# Altium PCB laser turret.PcbDoc
Units mm, origin at the board's own origin, x right, y up, seen from the top; angles counter-clockwise.
Board outline 44.45 x 35.81 mm, 2 copper layers (Top Layer, Bottom Layer); 30 components, 20 nets, 104 pads, 20 vias.
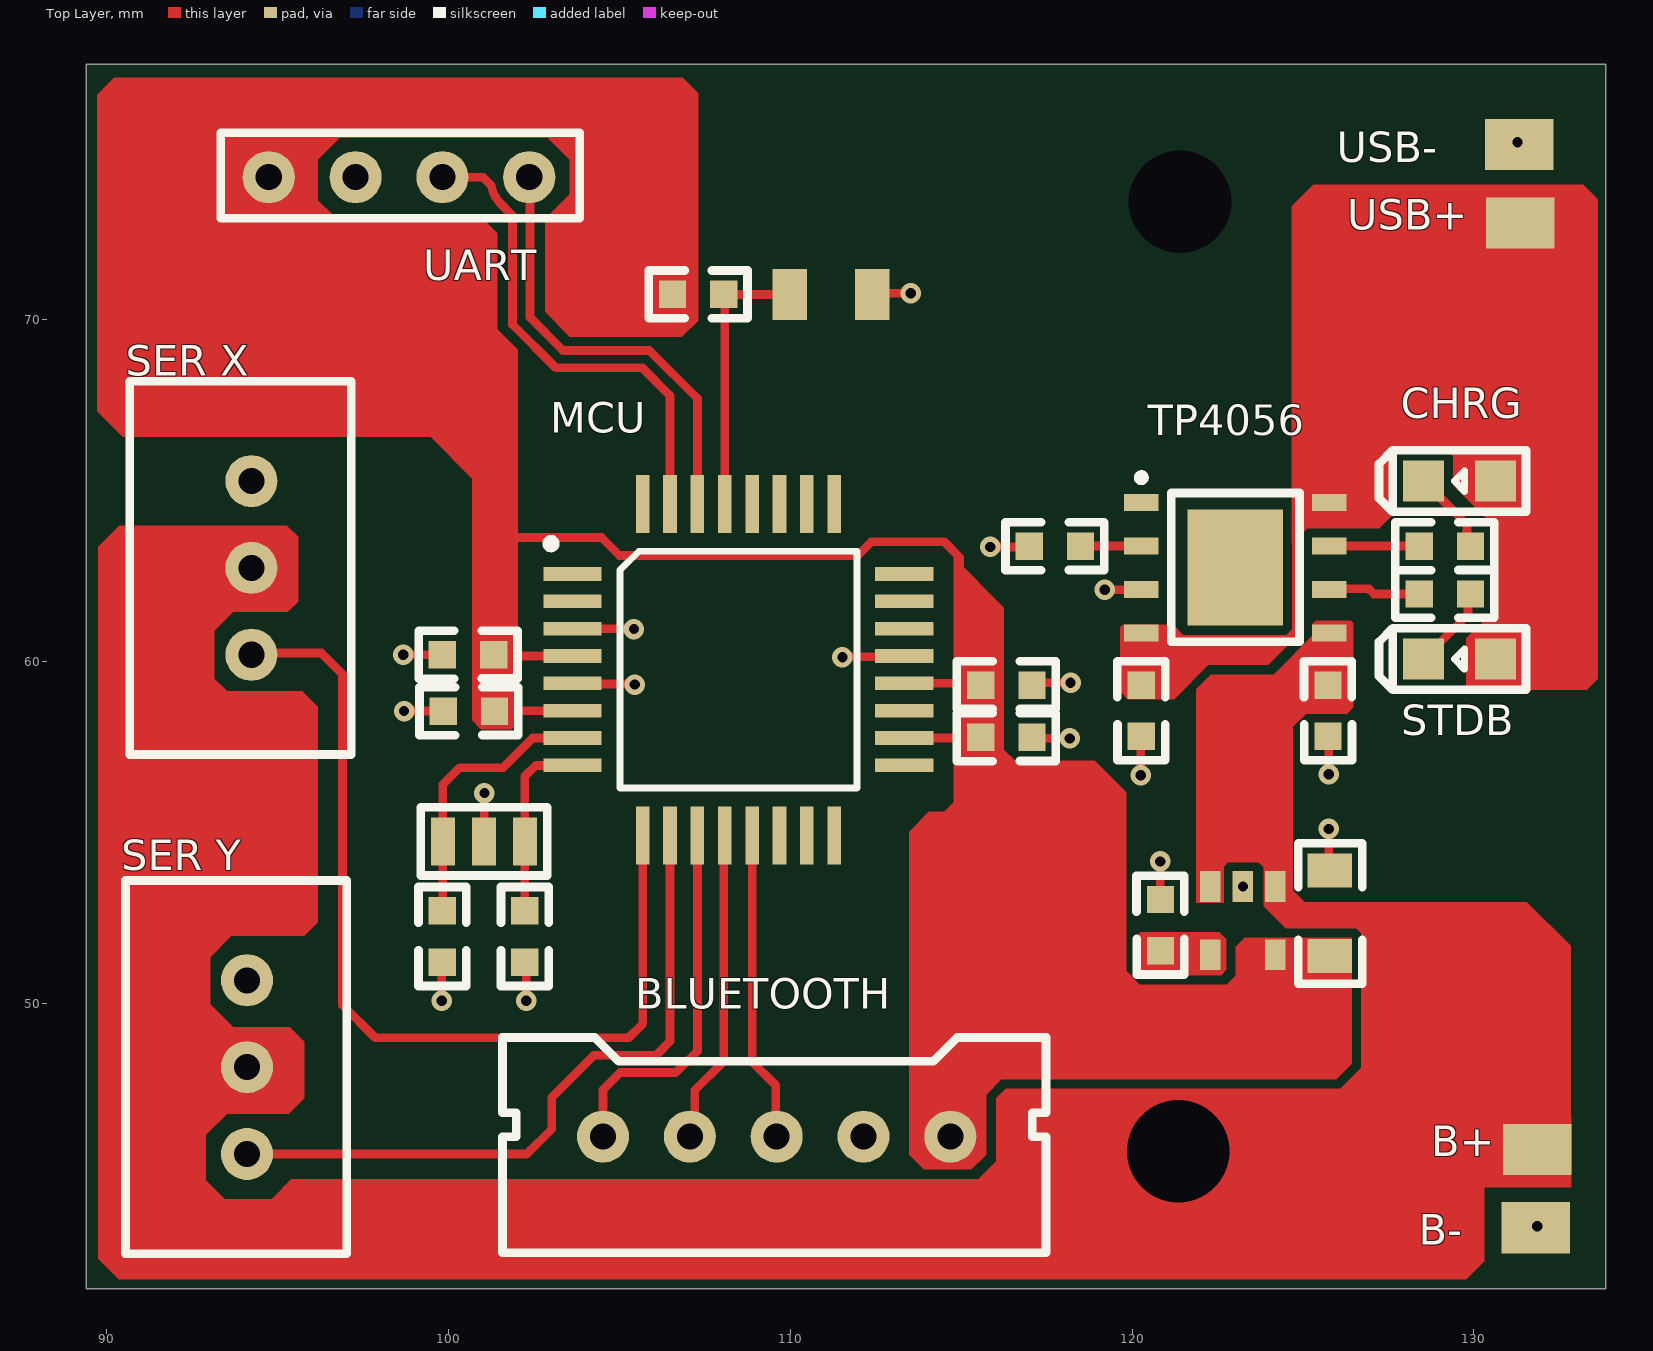
[diagram p0: Top Layer view]
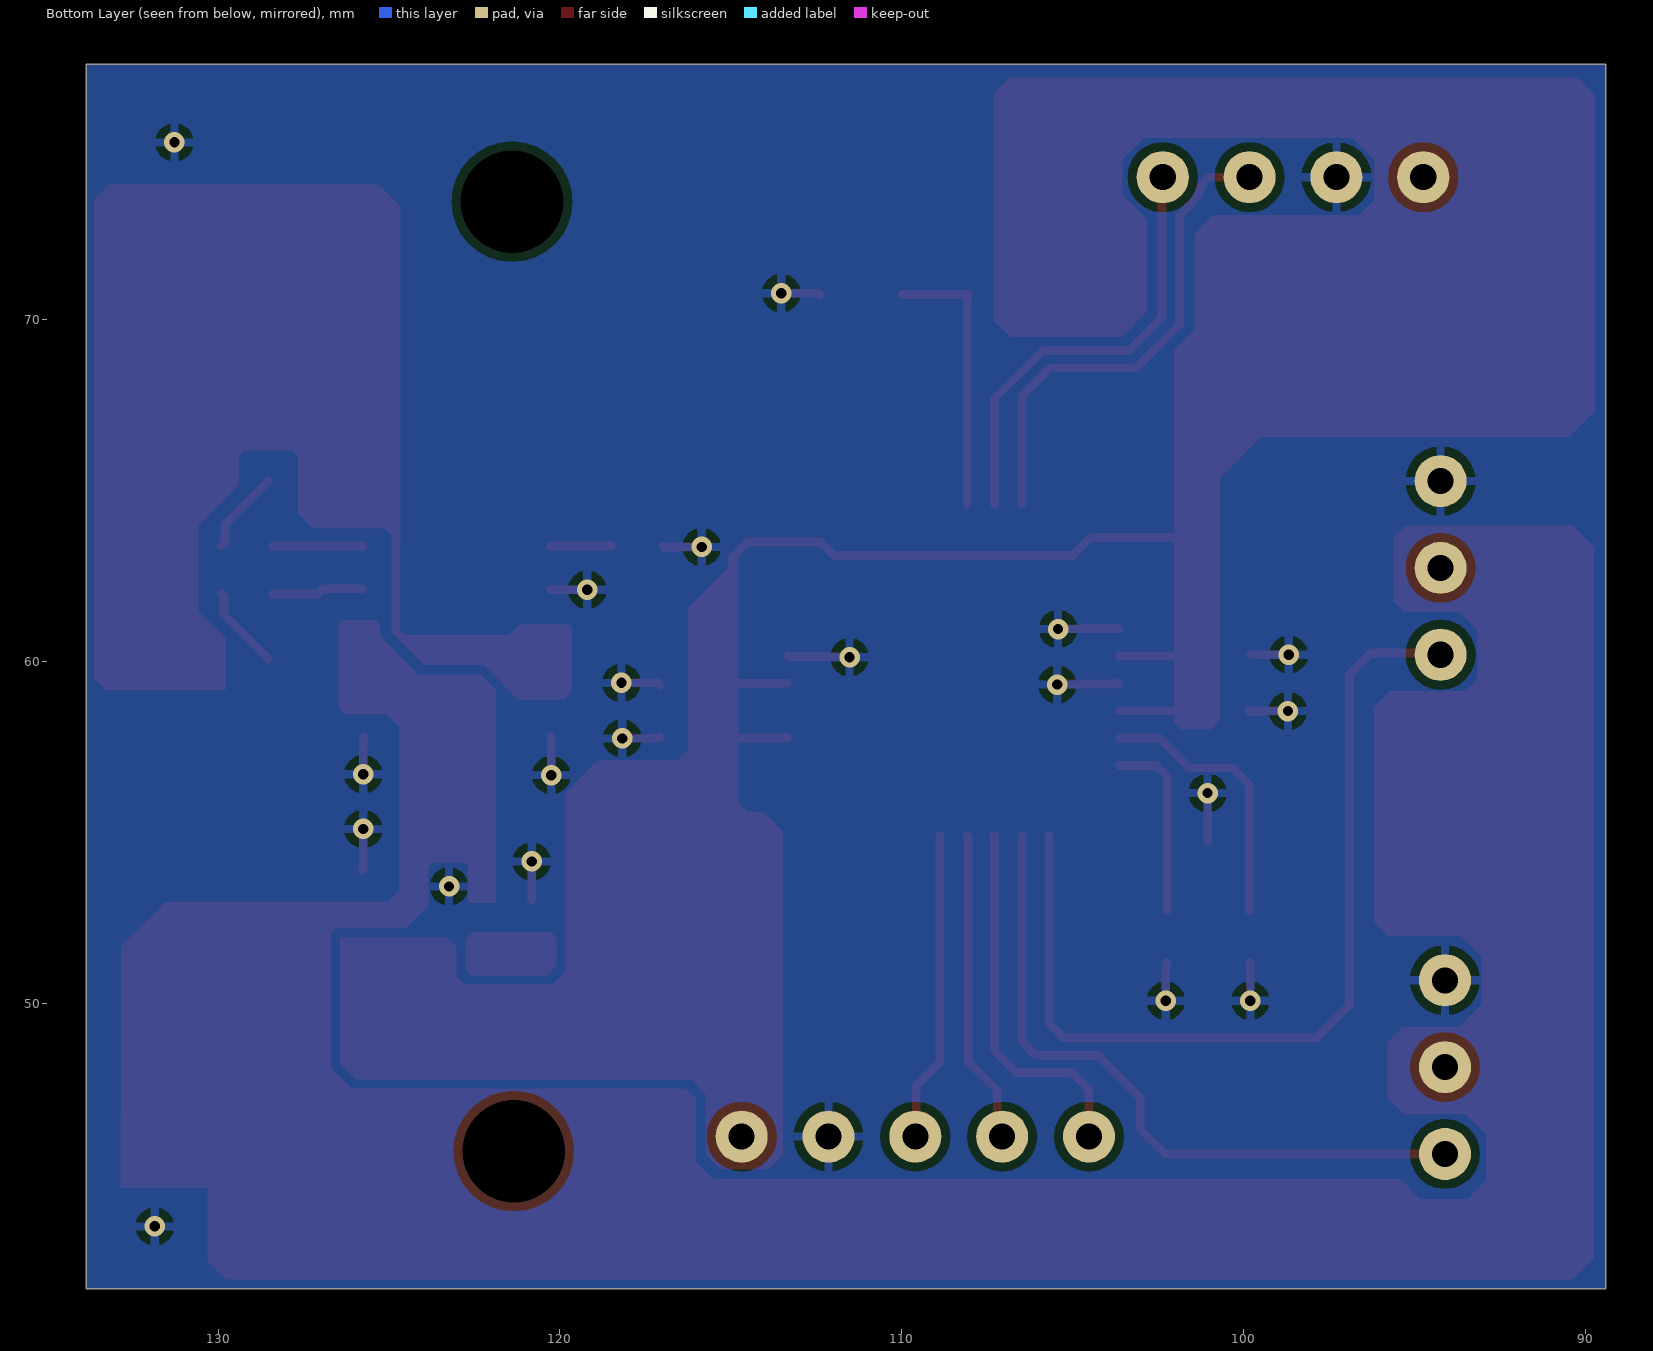
[diagram p1: Bottom Layer view, seen from below]
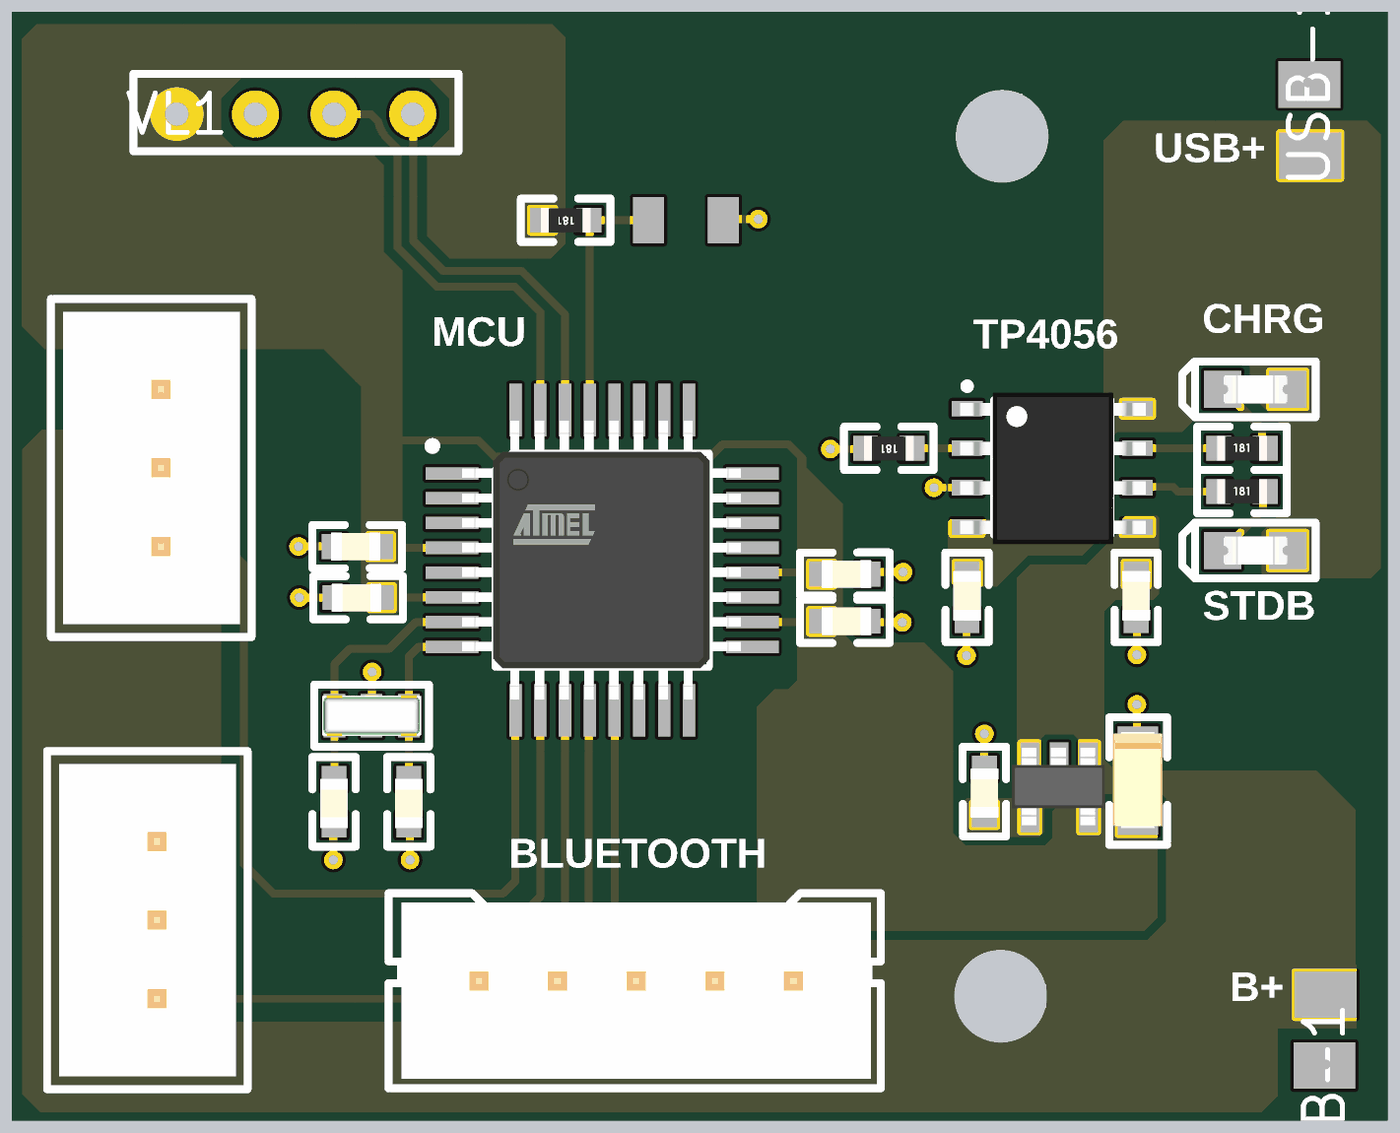
[diagram p2: 3D render of the assembled board from above, using the file's embedded part models]

## Layer stack, top to bottom
Top Solder: solder mask 0.0102, Solder Resist, Dk 3.5
Top Layer: signal copper 0.0356
Dielectric 1: dielectric 0.32, FR-4, Dk 4.8
Bottom Layer: signal copper 0.0356
Bottom Solder: solder mask 0.0102, Solder Resist, Dk 3.5

## Board outline
89.408,41.656 89.408,77.47 133.858,77.47 133.858,41.656

## Design rules (kind name [scope] priority, off if disabled: settings)
Clearance [All] p1: gap=0.254 ignorepadtopadclearanceinfootprint=FALSE except(0: Arc-Hole Track-Hole SMDPad-Hole THPad-Hole Via-Hole Fill-Hole Poly-Hole Region-Hole Text-Hole)
PolygonConnect [All] p1: connectstyle=Relief reliefconductorwidth=0.254 reliefentries=4 polygonreliefangle="90 Angle" airgapwidth=0.254
RoutingVias [All] p1: holewidth=0.711 width=1.27 viastyle="Through Hole" minholewidth=0.711 minwidth=1.27 maxholewidth=0.711 maxwidth=1.27
SolderMaskExpansion [All] p1: expansion=0.102 istentingtop=FALSE
Width [All] p1: maxlimit=0.254 minlimit=0.254 preferedwidth=0.254
30 further rules are at their usual default settings.

## Classes and differential pairs
component class "laser turret": "  " BLUETOOTH CHRG MCU "SER X" STDB TP4056 UART USB+ USB-

## Components (designator, comment, footprint, x,y, rotation, side; value= is the part's Value field where it differs from the comment)
1 "3.3v reg" "3.3v reg" 124.192,53.419 r180 top
* "PAD" PAD#1 112.395,70.739 r90 top
* "PAD" PAD#1 109.982,70.739 r90 top
B+ "PAD" PAD#2 131.85,45.725 r270 top (schematic designator B+1)
B- "PAD" PAD#2 131.807,43.433 r90 top (schematic designator B-1)
BLUETOOTH "5_PIN_JST" 5_PIN_JST 114.681,46.101 r180 top (schematic designator 2)
C1 "0603 CAP" "0603 CAP" 120.269,57.809 r90 top
C2 "0603 CAP" "0603 CAP" 125.73,57.809 r90 top
C3 "2.2uF TAN CAP" "2.2uF TAN CAP" 125.782,53.887 r270 top
C4 "0603 CAP" "0603 CAP" 101.322,60.198 r180 top
C5 "0603 CAP" "0603 CAP" 101.346,58.547 r180 top
C6 "0603 CAP" "0603 CAP" 115.57,57.785 r0 top
C7 "0603 CAP" "0603 CAP" 115.57,59.309 r0 top
C8 "0603 CAP" "0603 CAP" 120.829,53.038 r270 top
C9 "0603 CAP" "0603 CAP" 99.822,52.705 r270 top
C10 "0603 CAP" "0603 CAP" 102.235,52.705 r270 top
CHRG "SMD_0805_LED" 0805_LED 130.624,65.278 r180 top (schematic designator LED1)
MCU "atmega328p" atmega328p 103.632,62.56 r0 top (schematic designator U1)
R1 "0603 RES" "0603 RES" 129.897,63.373 r180 top
R2 "0603 RES" "0603 RES" 129.897,61.976 r180 top
R3 "0603 RES" "0603 RES" 116.991,63.373 r0 top
R4 "0603 RES" "0603 RES" 106.553,70.739 r0 top
"SER X" "servo" hall_jst 94.234,65.278 r270 top (schematic designator SER1)
"SER Y" "servo" hall_jst 94.107,50.673 r270 top (schematic designator SER2)
STDB "SMD_0805_LED" 0805_LED 130.624,60.071 r180 top (schematic designator LED2)
TP4056 "tp4056" tp4056 123.094,62.778 r0 top (schematic designator SOP1)
UART "VL53L0X" VL53L0x 94.742,74.168 r0 top (schematic designator VL1)
USB+ "PAD" PAD#2 131.35,72.825 r270 top (schematic designator USB+1)
USB- "PAD" PAD#2 131.325,75.125 r270 top (schematic designator USB-1)
X1 "smd crystal" "smd crystal" 102.235,54.737 r180 top

## Footprints (in the part's own frame and the unit in brackets; to place one, negate y for a bottom-side part, rotate by r counter-clockwise, add the part's x,y. Pads: shape width x height; smd on the part's side, far side on the other; paste and mask are expansions set on the pad)
"2.2uF TAN CAP" [mm]
  rect 1x1.3 smd: 1(0,0) 2(2.5,0)
  silkscreen extent -0.79,-0.93 3.32,0.95, body extent -0.33,-0.8 2.77,0.8, height 1.31
"3.3v reg" [mm]
  rect 0.6x0.9 smd: 1(0,0) 2(0.95,0) 3(1.9,0) 4(1.9,2) 5(0,2)
  body extent -0.52,-0.27 2.48,2.23, height 1.1
5_PIN_JST [mil]
  round 60 hole 30: 1(0,0) 2(100,0) 3(200,0) 4(300,0) 5(400,0)
  silkscreen extent -110,-114 516,134, body extent -98,-102 499,122, height 276
"0603 CAP" [mm]
  rect 0.8x0.8 smd: 1(0,0) 2(1.5,0)
  silkscreen extent -0.7,-0.7 2.2,0.7, body extent 0,-0.45 1.6,0.45, height 0.8
"0603 RES" [mm]
  rect 0.8x0.8 smd: 1(0,0) 2(1.5,0)
  silkscreen extent -0.7,-0.7 2.2,0.7, body extent -0.05,-0.4 1.55,0.4, height 0.45
0805_LED [mm]
  rect 1.2x1.2 smd: 1(0,0) 2(2.1,0)
  silkscreen extent -0.9,-0.9 3.4,0.9, body extent 0.01,-0.45 2.07,0.45, height 0.85
atmega328p [mm]
  rect 1.7x0.4 smd: 1(0,0) 2(0,-0.8) 3(0,-1.6) 4(0,-2.4) 5(0,-3.2) 6(0,-4) 7(0,-4.8) 8(0,-5.6) 17(9.7,-5.6) 18(9.7,-4.8) 19(9.7,-4) 20(9.7,-3.2) 21(9.7,-2.4) 22(9.7,-1.6) 23(9.7,-0.8) 24(9.7,0)
  rect 0.4x1.7 smd: 9(2.05,-7.65) 10(2.85,-7.65) 11(3.65,-7.65) 12(4.45,-7.65) 13(5.25,-7.65) 14(6.05,-7.65) 15(6.85,-7.65) 16(7.65,-7.65) 25(7.65,2.05) 26(6.85,2.05) 27(6.05,2.05) 28(5.25,2.05) 29(4.45,2.05) 30(3.65,2.05) 31(2.85,2.05) 32(2.05,2.05)
  silkscreen extent -0.76,-6.27 8.32,1.02, body extent 0.32,-7.3 9.33,1.71, height 1.15
hall_jst [mil]
  round 60 hole 30: 1(0,0) 2(100,0) 3(200,0)
  silkscreen extent -115,-140 315,115, body extent -98,-124 298,100, height 276
PAD#1 [mm]
  rect 1.5x1 smd: 1(0,0)
PAD#2 [mm]
  rect 1.5x2 smd: 1(0,0)
"smd crystal" [mm]
  rect 0.7x1.4 smd: 1(0,0) 2(1.2,0) 3(2.4,0)
  silkscreen extent -0.65,-1 3.05,1, body extent -0.4,-0.66 2.8,0.66, height 0.7
tp4056 [mm]
  rect 1x0.5 smd: 1(-2.825,1.875) 2(-2.825,0.6) 3(-2.825,-0.675) 4(-2.825,-1.95) 5(2.675,-1.95) 6(2.675,-0.675) 7(2.675,0.6) 8(2.675,1.875)
  rect 2.8x3.4 smd: 9(-0.075,-0.025)
  silkscreen extent -2.91,-2.2 1.8,2.69, body extent -3.05,-2.5 2.95,2.4, height 1.75
VL53L0x [mil]
  round 60 hole 30: 1(0,0) 2(100,0) 3(200,0) 4(300,0)
  silkscreen extent -55,-47 358,51

## Free pads (board coordinates)
  round 1.524 hole 3 unplated: 2(121.35,45.675) 3(121.4,73.45)

## Via types
v1: diameter 0.6, hole 0.3, Top Layer to Bottom Layer, 20 vias

## Nets (pads, with @x,y where several pads share a name; then routed paths per layer and width w, separated by ;. In a path a pad name is that pad's centre, name@x,y a point inside that pad or via, vN(x,y) a via of type N, cw(c..) or ccw(c..) an arc to the next point about the centre after c; other vN are vias at no path point)
Net1_1: 1.1 1.3 "SER X.2" "SER Y.2" B+.1 C2.2 pad.2 TP4056.5 | length 91.8
  Top Layer w0.254: 91.65,48.225 91.65,43.925 92.7,42.875 125.375,42.875 128.225,45.725 B+.1 131.6,45.975 131.6,49.925 128.925,52.6 125.011,52.6 124.515,53.096 124.365,53.096 124.192,53.269 1.1 124.192,55.425 ; 94.107,48.133 94.015,48.225 91.625,48.225 91.625,61.6 92.763,62.738 94.234,62.738 ; 1.3 122.292,55.167 122.55,55.425 124.192,55.425 ; C2.2 125.73,60.789 TP4056.5 125.519,60.828 124.192,59.501 124.192,55.425
Net1_2: 1.2 "SER X.1" "SER Y.1" *.1@112.395,70.739 B-.1 BLUETOOTH.2 C1.1 C2.1 C3.1 C4.2 C5.2 C6.2 C7.2 C8.1 C9.2 C10.2 MCU.3 MCU.5 MCU.21 R3.1 TP4056.3 UART.2 USB-.1 X1.2 | length 21.7
  Top Layer w0.254: v1(98.675,60.2) 99.82,60.2 C4.2 ; v1(98.7,58.55) 99.843,58.55 C5.2 ; v1(99.8,50.075) 99.8,51.183 C9.2 ; X1.2 101.043,54.745 101.043,56.142 v1(101.05,56.15) ; C10.2 102.275,51.165 v1(102.275,50.075) ; MCU.5 103.649,59.343 105.433,59.343 v1(105.45,59.325) ; MCU.3 103.637,60.955 105.42,60.955 v1(105.425,60.95) ; v1(111.525,60.125) 111.542,60.142 113.315,60.142 MCU.21 ; *.1@112.395,70.739 112.431,70.775 v1(113.525,70.775) ; v1(115.85,63.35) 116.968,63.35 R3.1 ; C6.2 117.105,57.75 v1(118.175,57.75) ; C7.2 117.136,59.375 v1(118.2,59.375) ; v1(119.2,62.1) 119.201,62.101 120.267,62.101 TP4056.3 ; v1(120.25,56.675) 120.25,57.79 C1.1 ; v1(120.825,54.15) 120.825,53.042 C8.1 ; C2.1 125.75,57.789 v1(125.75,56.7) ; v1(125.75,55.1) 125.75,53.919 C3.1
  other v1: 131.85,43.475 123.242,53.419 131.276,75.187
Net1_4: 1.4 C8.2 | length 1.5
  Top Layer w0.254: C8.2 122.173,51.538 1.4
Net1_5: 1.5 BLUETOOTH.1 C3.2 C4.1 C5.1 C6.1 C7.1 MCU.4 MCU.6 MCU.18 MCU.20 R4.1 UART.1 | length 81
  Top Layer w0.254: 94.475,70.375 94.475,71.966 94.742,72.233 UART.1 94.742,75.192 95.4,75.85 105.85,75.85 106.553,75.147 R4.1 ; MCU.6 101.359,58.56 C5.1 C4.1@101.346,60.174 ; MCU.4 101.36,60.16 C4.1@101.346,60.174 ; MCU.18 115.545,57.76 C6.1 ; MCU.20 115.519,59.36 C7.1 ; BLUETOOTH.1 114.6,46.182 114.6,48.225 115.57,49.195 115.57,49.9 ; 1.5 124.224,51.387 C3.2 125.782,50.224 125.633,50.075 115.745,50.075 115.57,49.9 ; C4.1@101.346,60.174 C4.1 101.375,60.251 101.375,63.475 101.225,63.625 104.475,63.625 105,63.1 111.975,63.1 112.375,63.5 114.5,63.5 114.95,63.05 114.95,61.838 115.57,61.219 C7.1 ; 115.57,49.9 C6.1 ; C6.1 C7.1
Net2_3: BLUETOOTH.3 MCU.13 | length 9.1
  Top Layer w0.254: MCU.13 108.882,48.293 109.575,47.6 109.575,46.127 BLUETOOTH.3
Net2_4: BLUETOOTH.4 MCU.12 | length 9.2
  Top Layer w0.254: BLUETOOTH.4 107.2,46.24 107.2,47.45 108.05,48.3 108.05,54.878 MCU.12
Net2_5: BLUETOOTH.5 MCU.11 | length 10.9
  Top Layer w0.254: BLUETOOTH.5 104.521,47.471 105.025,47.975 106.65,47.975 107.282,48.607 MCU.11
Net*_1: *.1@109.982,70.739 MCU.29 R4.2 | length 8.1
  Top Layer w0.254: MCU.29 108.082,70.71 R4.2 *.1@109.982,70.739
NetC1_2: C1.2 CHRG.1 STDB.1 TP4056.4 TP4056.8 USB+.1 | length 42.8
  Top Layer w0.254: TP4056.4 C1.2 121.199,60.239 124.143,60.239 124.472,60.567 ; 121.566,60.567 124.472,60.567 ; STDB.1 131.996,60.071 132.9,60.975 132.9,65.25 ; CHRG.1 132.872,65.278 132.9,65.25 ; USB+.1 132.625,72.825 132.9,72.55 132.9,68.9 ; 124.472,60.567 124.8,60.895 124.8,63.934 125.519,64.653 TP4056.8 126.903,64.653 127.1,64.85 127.1,67.925 128.075,68.9 132.9,68.9 ; 132.9,65.25 132.9,68.9
NetC9_1: C9.1 MCU.7 X1.3 | length 8.1
  Top Layer w0.254: C9.1 99.835,52.718 X1.3 99.835,56.401 100.33,56.896 101.6,56.896 102.464,57.76 MCU.7
NetC10_1: C10.1 MCU.8 X1.1 | length 5.5
  Top Layer w0.254: C10.1 X1.1 102.235,56.642 102.552,56.959 MCU.8 MCU.8
NetLED1_2: CHRG.2 R1.1 | length 2.5
  Top Layer w0.254: CHRG.2 128.997,64.805 129.797,64.005 129.797,63.473 R1.1
NetLED2_2: R2.1 STDB.2 | length 2.5
  Top Layer w0.254: STDB.2 129.825,61.372 129.825,61.904 R2.1
NetR1_2: R1.2 TP4056.7 | length 2.6
  Top Layer w0.254: TP4056.7 128.392,63.378 R1.2
NetR2_2: R2.2 TP4056.6 | length 2.7
  Top Layer w0.254: TP4056.6 125.791,62.125 126.925,62.125 127.075,61.975 128.3,61.975 128.301,61.976 R2.2
NetR3_2: R3.2 TP4056.2 | length 1.8
  Top Layer w0.254: R3.2 118.496,63.378 TP4056.2
NetSER1_3: "SER X.3" MCU.9 | length 27.5
  Top Layer w0.254: 94.234,60.198 94.286,60.25 96.275,60.25 96.9,59.625 96.9,49.95 97.859,48.991 105.275,48.991 105.682,49.398 MCU.9
NetSER2_3: "SER Y.3" MCU.10 | length 20.3
  Top Layer w0.254: 94.107,45.593 102.293,45.593 103.025,46.325 103.025,47.25 104.258,48.483 106.075,48.483 106.482,48.89 MCU.10
NetU1_30: MCU.30 UART.4 | length 13.1
  Top Layer w0.254: UART.4 102.383,74.147 102.383,70.067 103.35,69.1 105.875,69.1 107.282,67.693 MCU.30
NetU1_31: MCU.31 UART.3 | length 14.5
  Top Layer w0.254: UART.3 101.007,74.168 101.193,73.982 101.244,73.931 ccw(c102.362,74.168) 101.482,73.439 101.482,73.432 101.875,73.039 101.875,69.857 103.14,68.592 105.665,68.592 106.482,67.775 MCU.31
pads on no net: MCU.1 MCU.2 MCU.14 MCU.15 MCU.16 MCU.17 MCU.19 MCU.22 MCU.23 MCU.24 MCU.25 MCU.26 MCU.27 MCU.28 MCU.32 TP4056.1 TP4056.9

## Polygon pours and split planes (outlines as drawn)
Net1_2 on Bottom Layer "NONET_L-01_P-001" (solid, pour order 0): 89.4,77.475 133.85,77.475 133.85,41.65 89.4,41.65

## Other copper
Top Layer:
  region net Net1_1: 89.75,63.35 89.75,42.525 90.35,41.925 129.775,41.925 130.3,42.45 130.3,44.625 132.85,44.625 132.85,46.7 132.825,46.7 132.825,51.687 131.55,52.962 125.05,52.963 124.7,53.312 124.7,58.087 125.088,58.475 126.287,58.475 126.475,58.663 126.475,61.113 126.4,61.188 125.375,61.188 125.275,61.088 125.275,60.584 124.303,59.612 122.3,59.612 121.875,59.187 121.875,52.937 122.675,52.937 122.675,54 122.8,54.125 123.7,54.125 123.85,53.975 123.85,52.837 124.487,52.2 126.55,52.2 126.7,52.05 126.7,48.112 126.088,47.5 116.3,47.5 116.025,47.225 116.025,45.375 115.5,44.85 95.4,44.85 94.825,44.275 93.45,44.275 92.9,44.825 92.9,46.15 93.525,46.775 95.325,46.775 95.775,47.225 95.775,48.875 95.35,49.3 93.7,49.3 93.025,49.975 93.025,51.35 93.65,51.975 95.775,51.975 96.175,52.375 96.175,58.675 95.725,59.125 93.525,59.125 93.15,59.5 93.15,60.9 93.7,61.45 95.3,61.45 95.6,61.75 95.6,63.65 95.275,63.975 90.375,63.975
  region net Net1_5: 101.85,58.025 102.025,58.2 102.025,69.125 101.425,69.725 101.425,72.525 100.9,73.05 96.625,73.05 96.175,73.5 96.175,74.675 96.825,75.325 102.9,75.325 103.55,74.675 103.55,73.675 102.825,72.95 102.825,70.225 103.55,69.5 106.825,69.5 107.3,69.975 107.3,76.625 106.85,77.075 90.225,77.075 89.725,76.575 89.725,67.325 90.475,66.575 99.475,66.575 100.7,65.35 100.7,58.275 100.95,58.025
  region net Net1_4: 122.75,51.875 122.55,52.075 120.25,52.075 120.1,51.925 120.1,51.1 120.375,50.825 122.6,50.825 122.75,50.975
  region net Net1_5: 113.475,45.575 113.9,45.15 115.3,45.15 115.725,45.575 115.725,47.325 116.175,47.775 125.975,47.775 126.425,48.225 126.425,51.925 123.3,51.925 123.025,51.65 123.025,50.8 122.775,50.55 120.225,50.55 119.825,50.95 119.825,56.175 118.9,57.1 116.575,57.1 116.25,57.425 116.25,61.575 114.775,63.05 114.775,55.875 114.5,55.6 114.05,55.6 113.475,55.025
  region: 129.55,64.95
  region: 129.675,64.275
  region net NetC1_2: 124.675,63.45 124.675,73.325 125.3,73.95 133.2,73.95 133.625,73.525 133.625,59.5 133.3,59.175 129.775,59.175 129.775,60.675 130.575,61.475 130.575,63.975 129.4,65.15 129.4,66 129.225,66.175 127.825,66.175 127.65,66 127.65,64.325 127.225,63.9 125.125,63.9
  region net NetC1_2: 121.225,58.9 122.225,59.9 123.975,59.9 124.636,60.561 124.636,60.775 121.5,60.775 121.2,61.075 119.725,61.075 119.65,61 119.65,59.125 119.875,58.9

## Silkscreen, mask and mechanical layers (free items; w line width, h text height)
Mechanical 1:
  the board outline again, w0.254